# Altium PCB PCB1.PcbDoc (part 2 of 2)
Units mil, origin at the board's own origin, x right, y up, seen from the top; angles counter-clockwise.
Board outline 3035 x 2265 mil, 2 copper layers (Top Layer, Bottom Layer); 66 components, 70 nets, 274 pads, 24 vias.
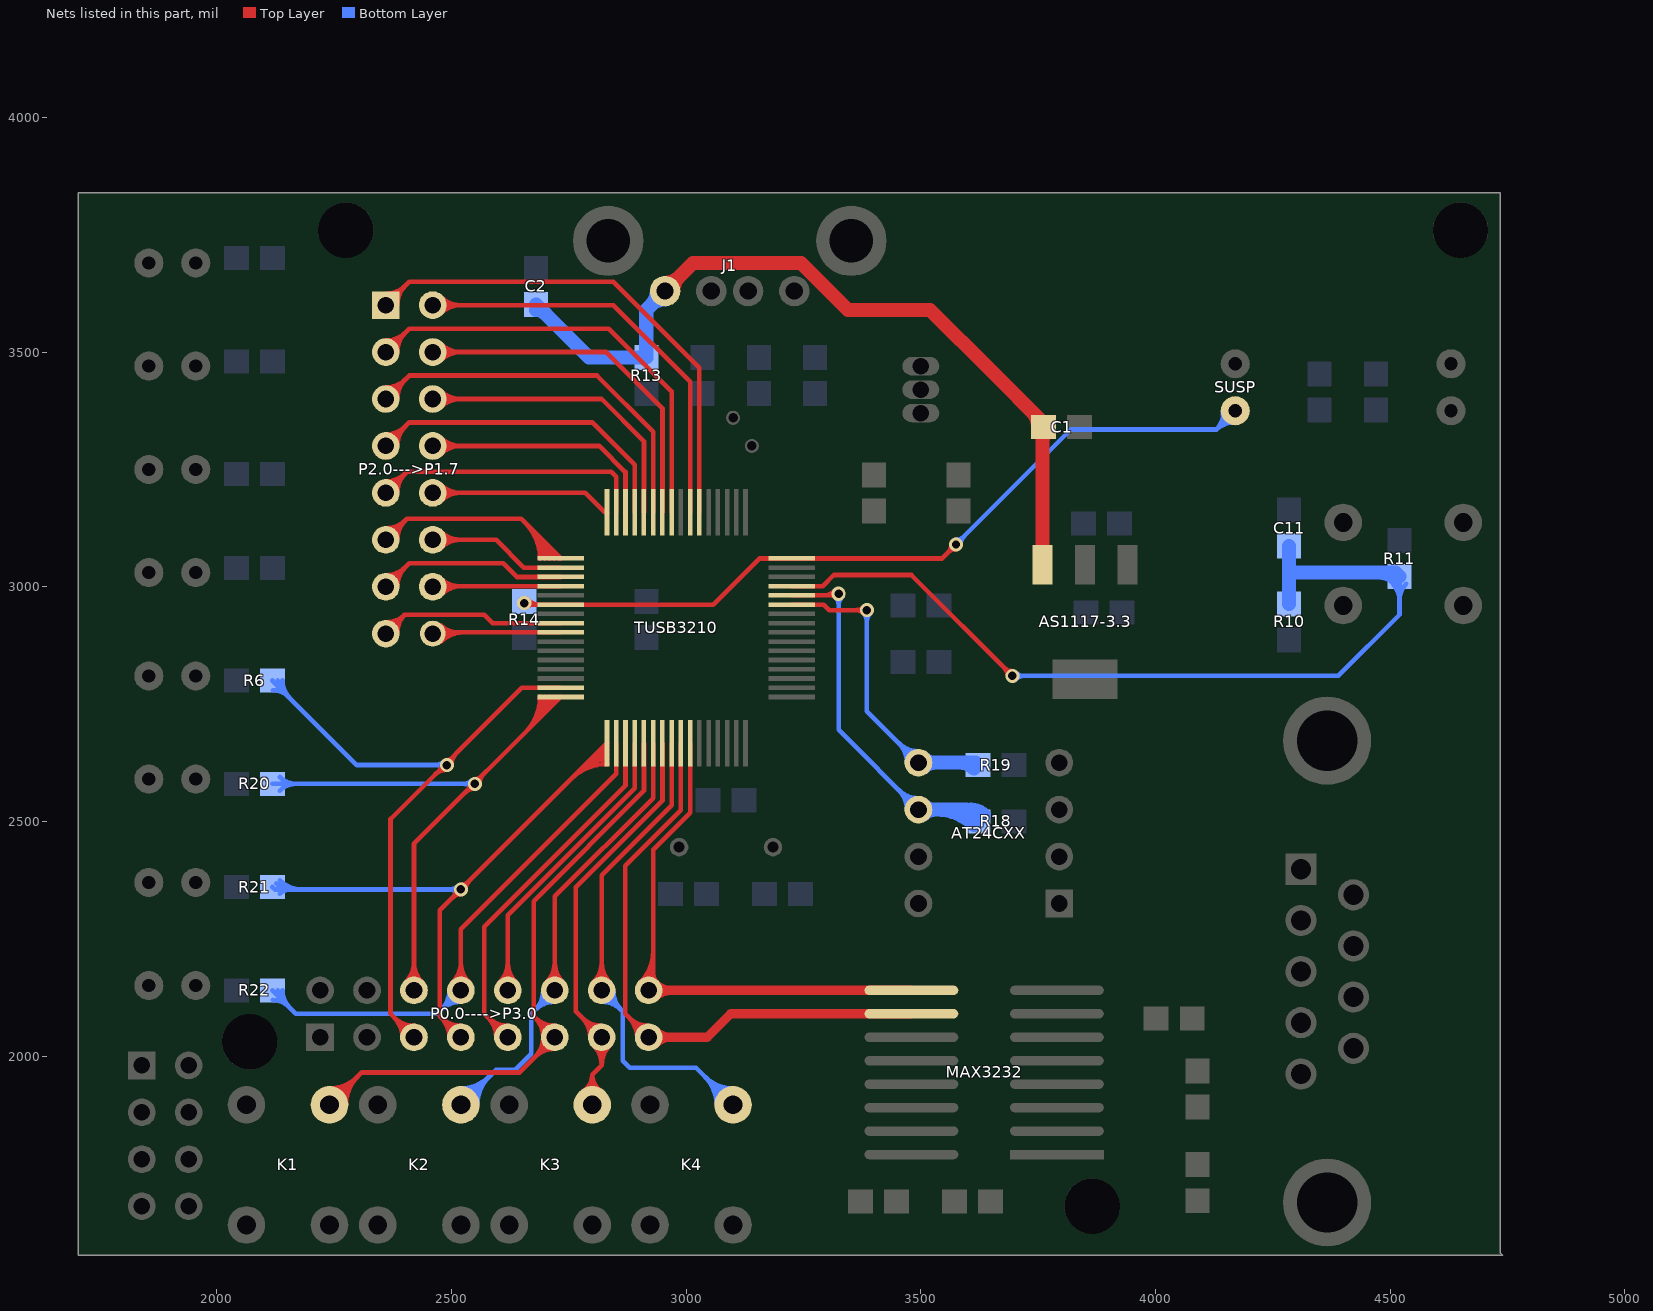
[diagram p2: the nets of this part, all layers, seen from the top]

## Via types
v1: diameter 30, hole 18, Top Layer to Bottom Layer, 24 vias

## Nets (pads, with @x,y where several pads share a name; then routed paths per layer and width w, separated by ;. In a path a pad name is that pad's centre, name@x,y a point inside that pad or via, vN(x,y) a via of type N, cw(c..) or ccw(c..) an arc to the next point about the centre after c; other vN are vias at no path point) (continued)
P0_4: P0.0---->P3.0.5 R6.1 TUSB3210.47 | length 2282.5
  Top Layer w10: P0.0---->P3.0.5@2420,2040 2370,2090 2370,2505 2649.68,2784.68 TUSB3210.47@2732.87,2784.68 ; 2378.13,2081.87 cw(c2336.26,2040) P0.0---->P3.0.5@2395.47,2040 ; 2378.13,2081.87 ccw(c2420,2123.74) P0.0---->P3.0.5@2420,2064.53 ; 2378.13,2081.87 cw(c2336.26,2040) P0.0---->P3.0.5@2395.47,2040 ; 2378.13,2081.87 ccw(c2420,2123.74) P0.0---->P3.0.5@2420,2064.53 ; 2378.13,2081.87 ccw(c2420,2123.74) P0.0---->P3.0.5@2420,2064.53 ; 2378.13,2081.87 cw(c2336.26,2040) P0.0---->P3.0.5@2395.47,2040 ; 2395.2,2064.8 cw(c2370.4,2040) P0.0---->P3.0.5@2405.47,2040 ; 2395.2,2064.8 ccw(c2420,2089.6) P0.0---->P3.0.5@2420,2054.53 ; 2395.2,2064.8 cw(c2370.4,2040) P0.0---->P3.0.5@2405.47,2040 ; 2395.2,2064.8 ccw(c2420,2089.6) P0.0---->P3.0.5@2420,2054.53 ; 2395.2,2064.8 ccw(c2420,2089.6) P0.0---->P3.0.5@2420,2054.53 ; 2395.2,2064.8 cw(c2370.4,2040) P0.0---->P3.0.5@2405.47,2040 ; 2464.39,2599.39 cw(c2490,2573.79) 2490,2610 ccw(c2490,2573.79) 2464.39,2599.39 ; 2476.46,2611.46 ccw(c2467.93,2620) 2480,2620 cw(c2467.93,2620) 2476.46,2611.46 ; v1@2490,2630 ccw(c2490,2642.07) 2498.54,2633.54 cw(c2490,2642.07) v1@2490,2630 ; v1@2500,2620 cw(c2536.21,2620) 2510.61,2645.61 ccw(c2536.21,2620) v1@2500,2620
  Bottom Layer w10: R6.1@2118.39,2800 2298.39,2620 v1(2490,2620) ; 2465.86,2620 cw(c2465.86,2595.86) 2482.93,2612.93 ccw(c2465.86,2595.86) 2465.86,2620 ; 2465.86,2620 ccw(c2465.86,2644.14) 2482.93,2627.07 cw(c2465.86,2644.14) 2465.86,2620 ; R6.1@2119.37,2779.41 cw(c2119.37,2732.08) 2152.84,2765.55 ccw(c2119.37,2732.08) R6.1@2119.37,2779.41 ; R6.1@2129.96,2800 ccw(c2157.91,2800) 2138.15,2780.24 cw(c2157.91,2800) R6.1@2129.96,2800 ; R6.1@2139.96,2800 ccw(c2192.05,2800) 2155.22,2763.17 cw(c2192.05,2800) R6.1@2139.96,2800
P0_5: P0.0---->P3.0.6 R20.1 TUSB3210.48 | length 2702.9
  Top Layer w10: P0.0---->P3.0.6@2420,2140 2420,2452.13 TUSB3210.48@2732.87,2765 ; P0.0---->P3.0.6@2402.66,2157.34 ccw(c2360.79,2199.21) 2420,2199.21 ; P0.0---->P3.0.6@2402.66,2157.34 ccw(c2360.79,2199.21) 2420,2199.21 ; P0.0---->P3.0.6@2402.66,2157.34 ccw(c2360.79,2199.21) 2420,2199.21 ; P0.0---->P3.0.6@2409.73,2150.27 ccw(c2384.93,2175.07) 2420,2175.07 ; P0.0---->P3.0.6@2409.73,2150.27 ccw(c2384.93,2175.07) 2420,2175.07 ; P0.0---->P3.0.6@2409.73,2150.27 ccw(c2384.93,2175.07) 2420,2175.07 ; 2420,2175.07 ccw(c2455.07,2175.07) P0.0---->P3.0.6@2430.27,2150.27 ; 2420,2175.07 ccw(c2455.07,2175.07) P0.0---->P3.0.6@2430.27,2150.27 ; 2420,2175.07 ccw(c2455.07,2175.07) P0.0---->P3.0.6@2430.27,2150.27 ; 2420,2199.21 ccw(c2479.21,2199.21) P0.0---->P3.0.6@2437.34,2157.34 ; 2420,2199.21 ccw(c2479.21,2199.21) P0.0---->P3.0.6@2437.34,2157.34 ; 2420,2199.21 ccw(c2479.21,2199.21) P0.0---->P3.0.6@2437.34,2157.34 ; 2657.4,2689.52 ccw(c2581.92,2765) TUSB3210.48@2688.66,2765 ; 2657.4,2689.52 ccw(c2581.92,2765) TUSB3210.48@2688.66,2765 ; 2657.4,2689.52 ccw(c2581.92,2765) TUSB3210.48@2688.66,2765 ; 2674.47,2706.6 ccw(c2616.07,2765) TUSB3210.48@2698.66,2765 ; 2674.47,2706.6 ccw(c2616.07,2765) TUSB3210.48@2698.66,2765 ; 2674.47,2706.6 ccw(c2616.07,2765) TUSB3210.48@2698.66,2765 ; 2691.54,2723.67 ccw(c2650.21,2765) TUSB3210.48@2708.66,2765 ; 2691.54,2723.67 ccw(c2650.21,2765) TUSB3210.48@2708.66,2765 ; 2691.54,2723.67 ccw(c2650.21,2765) TUSB3210.48@2708.66,2765 ; 2708.61,2740.74 ccw(c2684.35,2765) TUSB3210.48@2718.66,2765 ; 2708.61,2740.74 ccw(c2684.35,2765) TUSB3210.48@2718.66,2765 ; 2708.61,2740.74 ccw(c2684.35,2765) TUSB3210.48@2718.66,2765 ; 2725.68,2757.81 ccw(c2718.49,2765) TUSB3210.48@2728.66,2765 ; 2725.68,2757.81 ccw(c2718.49,2765) TUSB3210.48@2728.66,2765 ; 2725.68,2757.81 ccw(c2718.49,2765) TUSB3210.48@2728.66,2765 ; 2529.3,2561.43 cw(c2550,2540.73) 2550,2570 ccw(c2550,2540.73) 2529.3,2561.43 ; 2534.43,2566.56 ccw(c2520.99,2580) 2540,2580 cw(c2520.99,2580) 2534.43,2566.56 ; v1@2550,2590 ccw(c2550,2609.01) 2563.44,2595.57 cw(c2550,2609.01) v1@2550,2590 ; v1@2560,2580 cw(c2589.27,2580) 2568.57,2600.7 ccw(c2589.27,2580) v1@2560,2580
  Bottom Layer w10: R20.1@2118.39,2580 v1(2550,2580) ; 2169.08,2580 cw(c2169.08,2629.71) 2133.93,2594.56 ccw(c2169.08,2629.71) 2169.08,2580 ; 2169.08,2580 ccw(c2169.08,2530.29) 2133.93,2565.44 cw(c2169.08,2530.29) 2169.08,2580 ; 2525.86,2580 cw(c2525.86,2555.86) 2542.93,2572.93 ccw(c2525.86,2555.86) 2525.86,2580 ; 2525.86,2580 ccw(c2525.86,2604.14) 2542.93,2587.07 cw(c2525.86,2604.14) 2525.86,2580
P0_6: P0.0---->P3.0.7 R21.1 TUSB3210.49 | length 2780.1
  Top Layer w10: P0.0---->P3.0.7@2520,2040 2475,2085 2475,2310.28 TUSB3210.49@2831.3,2666.57 ; 2478.13,2081.87 cw(c2436.26,2040) P0.0---->P3.0.7@2495.47,2040 ; 2478.13,2081.87 ccw(c2520,2123.74) P0.0---->P3.0.7@2520,2064.53 ; 2478.13,2081.87 cw(c2436.26,2040) P0.0---->P3.0.7@2495.47,2040 ; 2478.13,2081.87 ccw(c2520,2123.74) P0.0---->P3.0.7@2520,2064.53 ; 2478.13,2081.87 ccw(c2520,2123.74) P0.0---->P3.0.7@2520,2064.53 ; 2478.13,2081.87 cw(c2436.26,2040) P0.0---->P3.0.7@2495.47,2040 ; 2495.2,2064.8 cw(c2470.4,2040) P0.0---->P3.0.7@2505.47,2040 ; 2495.2,2064.8 ccw(c2520,2089.6) P0.0---->P3.0.7@2520,2054.53 ; 2495.2,2064.8 cw(c2470.4,2040) P0.0---->P3.0.7@2505.47,2040 ; 2495.2,2064.8 ccw(c2520,2089.6) P0.0---->P3.0.7@2520,2054.53 ; 2495.2,2064.8 ccw(c2520,2089.6) P0.0---->P3.0.7@2520,2054.53 ; 2495.2,2064.8 cw(c2470.4,2040) P0.0---->P3.0.7@2505.47,2040 ; 2755.82,2591.1 cw(c2831.3,2515.62) TUSB3210.49@2831.3,2622.36 ; 2755.82,2591.1 cw(c2831.3,2515.62) TUSB3210.49@2831.3,2622.36 ; 2755.82,2591.1 cw(c2831.3,2515.62) TUSB3210.49@2831.3,2622.36 ; 2772.9,2608.17 cw(c2831.3,2549.77) TUSB3210.49@2831.3,2632.36 ; 2772.9,2608.17 cw(c2831.3,2549.77) TUSB3210.49@2831.3,2632.36 ; 2772.9,2608.17 cw(c2831.3,2549.77) TUSB3210.49@2831.3,2632.36 ; 2789.97,2625.24 cw(c2831.3,2583.91) TUSB3210.49@2831.3,2642.36 ; 2789.97,2625.24 cw(c2831.3,2583.91) TUSB3210.49@2831.3,2642.36 ; 2789.97,2625.24 cw(c2831.3,2583.91) TUSB3210.49@2831.3,2642.36 ; 2807.04,2642.31 cw(c2831.3,2618.05) TUSB3210.49@2831.3,2652.36 ; 2807.04,2642.31 cw(c2831.3,2618.05) TUSB3210.49@2831.3,2652.36 ; 2807.04,2642.31 cw(c2831.3,2618.05) TUSB3210.49@2831.3,2652.36 ; 2824.11,2659.38 cw(c2831.3,2652.19) TUSB3210.49@2831.3,2662.36 ; 2824.11,2659.38 cw(c2831.3,2652.19) TUSB3210.49@2831.3,2662.36 ; 2824.11,2659.38 cw(c2831.3,2652.19) TUSB3210.49@2831.3,2662.36 ; 2502.46,2337.73 cw(c2520,2320.19) 2520,2345 ccw(c2520,2320.19) 2502.46,2337.73 ; 2503.12,2338.4 ccw(c2486.52,2355) 2510,2355 cw(c2486.52,2355) 2503.12,2338.4 ; v1@2520,2365 ccw(c2520,2388.48) 2536.6,2371.88 cw(c2520,2388.48) v1@2520,2365 ; v1@2530,2355 cw(c2554.81,2355) 2537.27,2372.54 ccw(c2554.81,2355) v1@2530,2355
  Bottom Layer w10: R21.1@2118.39,2360 2123.39,2355 v1(2520,2355) ; 2157.01,2355 cw(c2157.01,2397.64) 2126.86,2367.49 ccw(c2157.01,2397.64) 2157.01,2355 ; 2157.01,2355 ccw(c2157.01,2322.36) 2133.93,2345.44 cw(c2157.01,2322.36) 2157.01,2355 ; 2495.86,2355 cw(c2495.86,2330.86) 2512.93,2347.93 ccw(c2495.86,2330.86) 2495.86,2355 ; 2495.86,2355 ccw(c2495.86,2379.14) 2512.93,2362.07 cw(c2495.86,2379.14) 2495.86,2355 ; R21.1@2133.93,2374.56 ccw(c2181.15,2421.78) 2181.15,2355 cw(c2181.15,2421.78) R21.1@2133.93,2374.56
P0_7: P0.0---->P3.0.8 R22.1 TUSB3210.50 | length 2047.3
  Top Layer w10: P0.0---->P3.0.8@2520,2140 2520,2270 2850.98,2600.98 TUSB3210.50@2850.98,2666.57 ; P0.0---->P3.0.8@2502.66,2157.34 ccw(c2460.79,2199.21) 2520,2199.21 ; P0.0---->P3.0.8@2502.66,2157.34 ccw(c2460.79,2199.21) 2520,2199.21 ; P0.0---->P3.0.8@2502.66,2157.34 ccw(c2460.79,2199.21) 2520,2199.21 ; P0.0---->P3.0.8@2509.73,2150.27 ccw(c2484.93,2175.07) 2520,2175.07 ; P0.0---->P3.0.8@2509.73,2150.27 ccw(c2484.93,2175.07) 2520,2175.07 ; P0.0---->P3.0.8@2509.73,2150.27 ccw(c2484.93,2175.07) 2520,2175.07 ; 2520,2175.07 ccw(c2555.07,2175.07) P0.0---->P3.0.8@2530.27,2150.27 ; 2520,2175.07 ccw(c2555.07,2175.07) P0.0---->P3.0.8@2530.27,2150.27 ; 2520,2175.07 ccw(c2555.07,2175.07) P0.0---->P3.0.8@2530.27,2150.27 ; 2520,2199.21 ccw(c2579.21,2199.21) P0.0---->P3.0.8@2537.34,2157.34 ; 2520,2199.21 ccw(c2579.21,2199.21) P0.0---->P3.0.8@2537.34,2157.34 ; 2520,2199.21 ccw(c2579.21,2199.21) P0.0---->P3.0.8@2537.34,2157.34
  Bottom Layer w10: R22.1@2118.39,2140 2168.39,2090 2470,2090 P0.0---->P3.0.8@2520,2140 ; 2478.13,2098.13 cw(c2520,2056.26) 2520,2115.47 ccw(c2520,2056.26) 2478.13,2098.13 ; 2478.13,2098.13 ccw(c2436.26,2140) 2495.47,2140 cw(c2436.26,2140) 2478.13,2098.13 ; 2495.2,2115.2 cw(c2520,2090.4) 2520,2125.47 ccw(c2520,2090.4) 2495.2,2115.2 ; 2495.2,2115.2 ccw(c2470.4,2140) 2505.47,2140 cw(c2470.4,2140) 2495.2,2115.2 ; R22.1@2119.37,2119.41 cw(c2119.37,2072.08) 2152.84,2105.55 ccw(c2119.37,2072.08) R22.1@2119.37,2119.41 ; R22.1@2129.96,2140 ccw(c2157.91,2140) 2138.15,2120.24 cw(c2157.91,2140) R22.1@2129.96,2140 ; R22.1@2139.96,2140 ccw(c2192.05,2140) 2155.22,2103.17 cw(c2192.05,2140) R22.1@2139.96,2140
P1_0: P2.0--->P1.7.9 TUSB3210.31 | length 1033.8
  Top Layer w10: P2.0--->P1.7.9@2360,3200 2405,3245 2840,3245 2850.98,3234.02 TUSB3210.31@2850.98,3158.7 ; P2.0--->P1.7.9@2360,3214.53 ccw(c2360,3249.6) 2384.8,3224.8 ; P2.0--->P1.7.9@2360,3214.53 ccw(c2360,3249.6) 2384.8,3224.8 ; P2.0--->P1.7.9@2360,3214.53 ccw(c2360,3249.6) 2384.8,3224.8 ; P2.0--->P1.7.9@2360,3224.53 ccw(c2360,3283.74) 2401.87,3241.87 ; P2.0--->P1.7.9@2360,3224.53 ccw(c2360,3283.74) 2401.87,3241.87 ; P2.0--->P1.7.9@2360,3224.53 ccw(c2360,3283.74) 2401.87,3241.87 ; P2.0--->P1.7.9@2374.53,3200 cw(c2409.6,3200) 2384.8,3224.8 ; P2.0--->P1.7.9@2374.53,3200 cw(c2409.6,3200) 2384.8,3224.8 ; P2.0--->P1.7.9@2374.53,3200 cw(c2409.6,3200) 2384.8,3224.8 ; P2.0--->P1.7.9@2384.53,3200 cw(c2443.74,3200) 2401.87,3241.87 ; P2.0--->P1.7.9@2384.53,3200 cw(c2443.74,3200) 2401.87,3241.87 ; P2.0--->P1.7.9@2384.53,3200 cw(c2443.74,3200) 2401.87,3241.87
P1_1: P2.0--->P1.7.10 TUSB3210.32 | length 832.7
  Top Layer w10: P2.0--->P1.7.10@2460,3200 2785,3200 2826.3,3158.7 TUSB3210.32@2831.3,3158.7 ; P2.0--->P1.7.10@2470.27,3189.73 cw(c2495.07,3164.93) 2495.07,3200 ; P2.0--->P1.7.10@2470.27,3189.73 cw(c2495.07,3164.93) 2495.07,3200 ; P2.0--->P1.7.10@2470.27,3189.73 cw(c2495.07,3164.93) 2495.07,3200 ; P2.0--->P1.7.10@2470.27,3210.27 ccw(c2495.07,3235.07) 2495.07,3200 ; P2.0--->P1.7.10@2470.27,3210.27 ccw(c2495.07,3235.07) 2495.07,3200 ; P2.0--->P1.7.10@2470.27,3210.27 ccw(c2495.07,3235.07) 2495.07,3200 ; P2.0--->P1.7.10@2477.34,3182.66 cw(c2519.21,3140.79) 2519.21,3200 ; P2.0--->P1.7.10@2477.34,3182.66 cw(c2519.21,3140.79) 2519.21,3200 ; P2.0--->P1.7.10@2477.34,3182.66 cw(c2519.21,3140.79) 2519.21,3200 ; P2.0--->P1.7.10@2477.34,3217.34 ccw(c2519.21,3259.21) 2519.21,3200 ; P2.0--->P1.7.10@2477.34,3217.34 ccw(c2519.21,3259.21) 2519.21,3200 ; P2.0--->P1.7.10@2477.34,3217.34 ccw(c2519.21,3259.21) 2519.21,3200
P1_2: P2.0--->P1.7.11 TUSB3210.33 | length 1559.6
  Top Layer w10: P2.0--->P1.7.11@2360,3100 2405,3145 2648.15,3145 TUSB3210.33@2732.87,3060.28 ; P2.0--->P1.7.11@2360,3114.53 ccw(c2360,3149.6) 2384.8,3124.8 ; P2.0--->P1.7.11@2360,3114.53 ccw(c2360,3149.6) 2384.8,3124.8 ; P2.0--->P1.7.11@2360,3114.53 ccw(c2360,3149.6) 2384.8,3124.8 ; P2.0--->P1.7.11@2360,3124.53 ccw(c2360,3183.74) 2401.87,3141.87 ; P2.0--->P1.7.11@2360,3124.53 ccw(c2360,3183.74) 2401.87,3141.87 ; P2.0--->P1.7.11@2360,3124.53 ccw(c2360,3183.74) 2401.87,3141.87 ; P2.0--->P1.7.11@2374.53,3100 cw(c2409.6,3100) 2384.8,3124.8 ; P2.0--->P1.7.11@2374.53,3100 cw(c2409.6,3100) 2384.8,3124.8 ; P2.0--->P1.7.11@2374.53,3100 cw(c2409.6,3100) 2384.8,3124.8 ; P2.0--->P1.7.11@2384.53,3100 cw(c2443.74,3100) 2401.87,3141.87 ; P2.0--->P1.7.11@2384.53,3100 cw(c2443.74,3100) 2401.87,3141.87 ; P2.0--->P1.7.11@2384.53,3100 cw(c2443.74,3100) 2401.87,3141.87 ; 2657.4,3135.75 cw(c2581.92,3060.28) TUSB3210.33@2688.66,3060.28 ; 2657.4,3135.75 cw(c2581.92,3060.28) TUSB3210.33@2688.66,3060.28 ; 2657.4,3135.75 cw(c2581.92,3060.28) TUSB3210.33@2688.66,3060.28 ; 2674.47,3118.68 cw(c2616.07,3060.28) TUSB3210.33@2698.66,3060.28 ; 2674.47,3118.68 cw(c2616.07,3060.28) TUSB3210.33@2698.66,3060.28 ; 2674.47,3118.68 cw(c2616.07,3060.28) TUSB3210.33@2698.66,3060.28 ; 2691.54,3101.61 cw(c2650.21,3060.28) TUSB3210.33@2708.66,3060.28 ; 2691.54,3101.61 cw(c2650.21,3060.28) TUSB3210.33@2708.66,3060.28 ; 2691.54,3101.61 cw(c2650.21,3060.28) TUSB3210.33@2708.66,3060.28 ; 2708.61,3084.54 cw(c2684.35,3060.28) TUSB3210.33@2718.66,3060.28 ; 2708.61,3084.54 cw(c2684.35,3060.28) TUSB3210.33@2718.66,3060.28 ; 2708.61,3084.54 cw(c2684.35,3060.28) TUSB3210.33@2718.66,3060.28 ; 2725.68,3067.47 cw(c2718.49,3060.28) TUSB3210.33@2728.66,3060.28 ; 2725.68,3067.47 cw(c2718.49,3060.28) TUSB3210.33@2728.66,3060.28 ; 2725.68,3067.47 cw(c2718.49,3060.28) TUSB3210.33@2728.66,3060.28
P1_3: P2.0--->P1.7.12 TUSB3210.34 | length 741.8
  Top Layer w10: P2.0--->P1.7.12@2460,3100 2595,3100 2654.41,3040.59 TUSB3210.34@2732.87,3040.59 ; P2.0--->P1.7.12@2470.27,3089.73 cw(c2495.07,3064.93) 2495.07,3100 ; P2.0--->P1.7.12@2470.27,3089.73 cw(c2495.07,3064.93) 2495.07,3100 ; P2.0--->P1.7.12@2470.27,3089.73 cw(c2495.07,3064.93) 2495.07,3100 ; P2.0--->P1.7.12@2470.27,3110.27 ccw(c2495.07,3135.07) 2495.07,3100 ; P2.0--->P1.7.12@2470.27,3110.27 ccw(c2495.07,3135.07) 2495.07,3100 ; P2.0--->P1.7.12@2470.27,3110.27 ccw(c2495.07,3135.07) 2495.07,3100 ; P2.0--->P1.7.12@2477.34,3082.66 cw(c2519.21,3040.79) 2519.21,3100 ; P2.0--->P1.7.12@2477.34,3082.66 cw(c2519.21,3040.79) 2519.21,3100 ; P2.0--->P1.7.12@2477.34,3082.66 cw(c2519.21,3040.79) 2519.21,3100 ; P2.0--->P1.7.12@2477.34,3117.34 ccw(c2519.21,3159.21) 2519.21,3100 ; P2.0--->P1.7.12@2477.34,3117.34 ccw(c2519.21,3159.21) 2519.21,3100 ; P2.0--->P1.7.12@2477.34,3117.34 ccw(c2519.21,3159.21) 2519.21,3100
P1_4: P2.0--->P1.7.13 TUSB3210.35 | length 850
  Top Layer w10: P2.0--->P1.7.13@2360,3000 2410,3050 2610,3050 2639.09,3020.91 TUSB3210.35@2732.87,3020.91 ; P2.0--->P1.7.13@2360,3014.53 ccw(c2360,3049.6) 2384.8,3024.8 ; P2.0--->P1.7.13@2360,3014.53 ccw(c2360,3049.6) 2384.8,3024.8 ; P2.0--->P1.7.13@2360,3014.53 ccw(c2360,3049.6) 2384.8,3024.8 ; P2.0--->P1.7.13@2360,3024.53 ccw(c2360,3083.74) 2401.87,3041.87 ; P2.0--->P1.7.13@2360,3024.53 ccw(c2360,3083.74) 2401.87,3041.87 ; P2.0--->P1.7.13@2360,3024.53 ccw(c2360,3083.74) 2401.87,3041.87 ; P2.0--->P1.7.13@2374.53,3000 cw(c2409.6,3000) 2384.8,3024.8 ; P2.0--->P1.7.13@2374.53,3000 cw(c2409.6,3000) 2384.8,3024.8 ; P2.0--->P1.7.13@2374.53,3000 cw(c2409.6,3000) 2384.8,3024.8 ; P2.0--->P1.7.13@2384.53,3000 cw(c2443.74,3000) 2401.87,3041.87 ; P2.0--->P1.7.13@2384.53,3000 cw(c2443.74,3000) 2401.87,3041.87 ; P2.0--->P1.7.13@2384.53,3000 cw(c2443.74,3000) 2401.87,3041.87
P1_5: P2.0--->P1.7.14 TUSB3210.36 | length 717.7
  Top Layer w10: P2.0--->P1.7.14@2460,3000 2461.22,3001.22 TUSB3210.36@2732.87,3001.22 ; P2.0--->P1.7.14@2470.27,2989.73 cw(c2498.02,2961.98) 2498.02,3001.22 ; P2.0--->P1.7.14@2470.27,2989.73 cw(c2498.02,2961.98) 2498.02,3001.22 ; P2.0--->P1.7.14@2470.27,2989.73 cw(c2498.02,2961.98) 2498.02,3001.22 ; P2.0--->P1.7.14@2470.27,3010.27 ccw(c2492.13,3032.13) 2492.13,3001.22 ; P2.0--->P1.7.14@2470.27,3010.27 ccw(c2492.13,3032.13) 2492.13,3001.22 ; P2.0--->P1.7.14@2470.27,3010.27 ccw(c2492.13,3032.13) 2492.13,3001.22 ; P2.0--->P1.7.14@2477.34,2982.66 cw(c2522.16,2937.84) 2522.16,3001.22 ; P2.0--->P1.7.14@2477.34,2982.66 cw(c2522.16,2937.84) 2522.16,3001.22 ; P2.0--->P1.7.14@2477.34,2982.66 cw(c2522.16,2937.84) 2522.16,3001.22 ; P2.0--->P1.7.14@2477.34,3017.34 ccw(c2516.27,3056.27) 2516.27,3001.22 ; P2.0--->P1.7.14@2477.34,3017.34 ccw(c2516.27,3056.27) 2516.27,3001.22 ; P2.0--->P1.7.14@2477.34,3017.34 ccw(c2516.27,3056.27) 2516.27,3001.22
P1_6: P2.0--->P1.7.15 TUSB3210.40 | length 534.7
  Top Layer w10: P2.0--->P1.7.15@2360,2900 2400,2940 ; P2.0--->P1.7.15@2360.48,2914.52 ccw(c2361.51,2945.87) 2383.69,2923.69 ccw(c2405.87,2901.51) P2.0--->P1.7.15@2374.52,2900.48 ; P2.0--->P1.7.15@2360.81,2924.51 ccw(c2362.55,2977.45) 2400,2940 ; P2.0--->P1.7.15@2384.51,2900.81 cw(c2437.45,2902.55) 2400,2940 ; TUSB3210.40@2732.87,2922.48 2587.48,2922.48 2569.96,2940 2400,2940
P1_7: P2.0--->P1.7.16 TUSB3210.41 | length 646.7
  Top Layer w10: P2.0--->P1.7.16@2460,2900 2462.8,2902.8 TUSB3210.41@2732.87,2902.8 ; P2.0--->P1.7.16@2468.84,2891.16 cw(c2496.93,2863.07) 2496.93,2902.8 ; P2.0--->P1.7.16@2475.91,2884.09 cw(c2521.07,2838.93) 2521.07,2902.8 ; P2.0--->P1.7.16@2475.91,2915.91 ccw(c2507.57,2947.57) 2507.57,2902.8 ; P2.0--->P1.7.16@2470.27,2889.73 cw(c2501.82,2858.18) 2501.82,2902.8 ccw(c2501.82,2858.18) P2.0--->P1.7.16@2470.27,2889.73 ; P2.0--->P1.7.16@2477.34,2882.66 cw(c2525.96,2834.04) 2525.96,2902.8 ccw(c2525.96,2834.04) P2.0--->P1.7.16@2477.34,2882.66 ; P2.0--->P1.7.16@2477.34,2917.34 ccw(c2512.47,2952.47) 2512.47,2902.8 cw(c2512.47,2952.47) P2.0--->P1.7.16@2477.34,2917.34
P2_0: P2.0--->P1.7.1 TUSB3210.22 | length 1517.2
  Top Layer w10: P2.0--->P1.7.1@2360,3600 2410,3650 2845,3650 3028.15,3466.85 TUSB3210.22@3028.15,3158.7 ; P2.0--->P1.7.1@2360,3614.53 ccw(c2360,3649.6) P2.0--->P1.7.1@2384.8,3624.8 ; P2.0--->P1.7.1@2360,3614.53 ccw(c2360,3649.6) P2.0--->P1.7.1@2384.8,3624.8 ; P2.0--->P1.7.1@2360,3614.53 ccw(c2360,3649.6) P2.0--->P1.7.1@2384.8,3624.8 ; P2.0--->P1.7.1@2360,3624.53 ccw(c2360,3683.74) 2401.87,3641.87 ; P2.0--->P1.7.1@2360,3624.53 ccw(c2360,3683.74) 2401.87,3641.87 ; P2.0--->P1.7.1@2360,3624.53 ccw(c2360,3683.74) 2401.87,3641.87 ; P2.0--->P1.7.1@2374.53,3600 cw(c2409.6,3600) P2.0--->P1.7.1@2384.8,3624.8 ; P2.0--->P1.7.1@2374.53,3600 cw(c2409.6,3600) P2.0--->P1.7.1@2384.8,3624.8 ; P2.0--->P1.7.1@2374.53,3600 cw(c2409.6,3600) P2.0--->P1.7.1@2384.8,3624.8 ; P2.0--->P1.7.1@2384.53,3600 cw(c2443.74,3600) 2401.87,3641.87 ; P2.0--->P1.7.1@2384.53,3600 cw(c2443.74,3600) 2401.87,3641.87 ; P2.0--->P1.7.1@2384.53,3600 cw(c2443.74,3600) 2401.87,3641.87
P2_1: P2.0--->P1.7.2 TUSB3210.23 | length 1338.3
  Top Layer w10: P2.0--->P1.7.2@2460,3600 2845,3600 3008.46,3436.54 TUSB3210.23@3008.46,3158.7 ; P2.0--->P1.7.2@2470.27,3589.73 cw(c2495.07,3564.93) 2495.07,3600 ; P2.0--->P1.7.2@2470.27,3589.73 cw(c2495.07,3564.93) 2495.07,3600 ; P2.0--->P1.7.2@2470.27,3589.73 cw(c2495.07,3564.93) 2495.07,3600 ; P2.0--->P1.7.2@2470.27,3610.27 ccw(c2495.07,3635.07) 2495.07,3600 ; P2.0--->P1.7.2@2470.27,3610.27 ccw(c2495.07,3635.07) 2495.07,3600 ; P2.0--->P1.7.2@2470.27,3610.27 ccw(c2495.07,3635.07) 2495.07,3600 ; P2.0--->P1.7.2@2477.34,3582.66 cw(c2519.21,3540.79) 2519.21,3600 ; P2.0--->P1.7.2@2477.34,3582.66 cw(c2519.21,3540.79) 2519.21,3600 ; P2.0--->P1.7.2@2477.34,3582.66 cw(c2519.21,3540.79) 2519.21,3600 ; P2.0--->P1.7.2@2477.34,3617.34 ccw(c2519.21,3659.21) 2519.21,3600 ; P2.0--->P1.7.2@2477.34,3617.34 ccw(c2519.21,3659.21) 2519.21,3600 ; P2.0--->P1.7.2@2477.34,3617.34 ccw(c2519.21,3659.21) 2519.21,3600
P2_2: P2.0--->P1.7.3 TUSB3210.25 | length 1386.9
  Top Layer w10: P2.0--->P1.7.3@2360,3500 2410,3550 2835,3550 2969.09,3415.91 TUSB3210.25@2969.09,3158.7 ; P2.0--->P1.7.3@2360,3514.53 ccw(c2360,3549.6) 2384.8,3524.8 ; P2.0--->P1.7.3@2360,3514.53 ccw(c2360,3549.6) 2384.8,3524.8 ; P2.0--->P1.7.3@2360,3514.53 ccw(c2360,3549.6) 2384.8,3524.8 ; P2.0--->P1.7.3@2360,3524.53 ccw(c2360,3583.74) 2401.87,3541.87 ; P2.0--->P1.7.3@2360,3524.53 ccw(c2360,3583.74) 2401.87,3541.87 ; P2.0--->P1.7.3@2360,3524.53 ccw(c2360,3583.74) 2401.87,3541.87 ; P2.0--->P1.7.3@2374.53,3500 cw(c2409.6,3500) 2384.8,3524.8 ; P2.0--->P1.7.3@2374.53,3500 cw(c2409.6,3500) 2384.8,3524.8 ; P2.0--->P1.7.3@2374.53,3500 cw(c2409.6,3500) 2384.8,3524.8 ; P2.0--->P1.7.3@2384.53,3500 cw(c2443.74,3500) 2401.87,3541.87 ; P2.0--->P1.7.3@2384.53,3500 cw(c2443.74,3500) 2401.87,3541.87 ; P2.0--->P1.7.3@2384.53,3500 cw(c2443.74,3500) 2401.87,3541.87
P2_3: P2.0--->P1.7.4 TUSB3210.26 | length 1205.1
  Top Layer w10: P2.0--->P1.7.4@2460,3500 2830,3500 2949.41,3380.59 TUSB3210.26@2949.41,3158.7 ; P2.0--->P1.7.4@2470.27,3489.73 cw(c2495.07,3464.93) 2495.07,3500 ; P2.0--->P1.7.4@2470.27,3489.73 cw(c2495.07,3464.93) 2495.07,3500 ; P2.0--->P1.7.4@2470.27,3489.73 cw(c2495.07,3464.93) 2495.07,3500 ; P2.0--->P1.7.4@2470.27,3510.27 ccw(c2495.07,3535.07) 2495.07,3500 ; P2.0--->P1.7.4@2470.27,3510.27 ccw(c2495.07,3535.07) 2495.07,3500 ; P2.0--->P1.7.4@2470.27,3510.27 ccw(c2495.07,3535.07) 2495.07,3500 ; P2.0--->P1.7.4@2477.34,3482.66 cw(c2519.21,3440.79) 2519.21,3500 ; P2.0--->P1.7.4@2477.34,3482.66 cw(c2519.21,3440.79) 2519.21,3500 ; P2.0--->P1.7.4@2477.34,3482.66 cw(c2519.21,3440.79) 2519.21,3500 ; P2.0--->P1.7.4@2477.34,3517.34 ccw(c2519.21,3559.21) 2519.21,3500 ; P2.0--->P1.7.4@2477.34,3517.34 ccw(c2519.21,3559.21) 2519.21,3500 ; P2.0--->P1.7.4@2477.34,3517.34 ccw(c2519.21,3559.21) 2519.21,3500
P2_4: P2.0--->P1.7.5 TUSB3210.27 | length 1255.9
  Top Layer w10: P2.0--->P1.7.5@2360,3400 2410,3450 2810,3450 2929.72,3330.28 TUSB3210.27@2929.72,3158.7 ; P2.0--->P1.7.5@2360,3414.53 ccw(c2360,3449.6) 2384.8,3424.8 ; P2.0--->P1.7.5@2360,3414.53 ccw(c2360,3449.6) 2384.8,3424.8 ; P2.0--->P1.7.5@2360,3414.53 ccw(c2360,3449.6) 2384.8,3424.8 ; P2.0--->P1.7.5@2360,3424.53 ccw(c2360,3483.74) 2401.87,3441.87 ; P2.0--->P1.7.5@2360,3424.53 ccw(c2360,3483.74) 2401.87,3441.87 ; P2.0--->P1.7.5@2360,3424.53 ccw(c2360,3483.74) 2401.87,3441.87 ; P2.0--->P1.7.5@2374.53,3400 cw(c2409.6,3400) 2384.8,3424.8 ; P2.0--->P1.7.5@2374.53,3400 cw(c2409.6,3400) 2384.8,3424.8 ; P2.0--->P1.7.5@2374.53,3400 cw(c2409.6,3400) 2384.8,3424.8 ; P2.0--->P1.7.5@2384.53,3400 cw(c2443.74,3400) 2401.87,3441.87 ; P2.0--->P1.7.5@2384.53,3400 cw(c2443.74,3400) 2401.87,3441.87 ; P2.0--->P1.7.5@2384.53,3400 cw(c2443.74,3400) 2401.87,3441.87
P2_5: P2.0--->P1.7.6 TUSB3210.28 | length 1082.9
  Top Layer w10: P2.0--->P1.7.6@2460,3400 2820,3400 2910.04,3309.96 TUSB3210.28@2910.04,3158.7 ; P2.0--->P1.7.6@2470.27,3389.73 cw(c2495.07,3364.93) 2495.07,3400 ; P2.0--->P1.7.6@2470.27,3389.73 cw(c2495.07,3364.93) 2495.07,3400 ; P2.0--->P1.7.6@2470.27,3389.73 cw(c2495.07,3364.93) 2495.07,3400 ; P2.0--->P1.7.6@2470.27,3410.27 ccw(c2495.07,3435.07) 2495.07,3400 ; P2.0--->P1.7.6@2470.27,3410.27 ccw(c2495.07,3435.07) 2495.07,3400 ; P2.0--->P1.7.6@2470.27,3410.27 ccw(c2495.07,3435.07) 2495.07,3400 ; P2.0--->P1.7.6@2477.34,3382.66 cw(c2519.21,3340.79) 2519.21,3400 ; P2.0--->P1.7.6@2477.34,3382.66 cw(c2519.21,3340.79) 2519.21,3400 ; P2.0--->P1.7.6@2477.34,3382.66 cw(c2519.21,3340.79) 2519.21,3400 ; P2.0--->P1.7.6@2477.34,3417.34 ccw(c2519.21,3459.21) 2519.21,3400 ; P2.0--->P1.7.6@2477.34,3417.34 ccw(c2519.21,3459.21) 2519.21,3400 ; P2.0--->P1.7.6@2477.34,3417.34 ccw(c2519.21,3459.21) 2519.21,3400
P2_6: P2.0--->P1.7.7 TUSB3210.29 | length 1133.8
  Top Layer w10: P2.0--->P1.7.7@2360,3300 2410,3350 2800,3350 2890.35,3259.65 TUSB3210.29@2890.35,3158.7 ; P2.0--->P1.7.7@2360,3314.53 ccw(c2360,3349.6) 2384.8,3324.8 ; P2.0--->P1.7.7@2360,3314.53 ccw(c2360,3349.6) 2384.8,3324.8 ; P2.0--->P1.7.7@2360,3314.53 ccw(c2360,3349.6) 2384.8,3324.8 ; P2.0--->P1.7.7@2360,3324.53 ccw(c2360,3383.74) 2401.87,3341.87 ; P2.0--->P1.7.7@2360,3324.53 ccw(c2360,3383.74) 2401.87,3341.87 ; P2.0--->P1.7.7@2360,3324.53 ccw(c2360,3383.74) 2401.87,3341.87 ; P2.0--->P1.7.7@2374.53,3300 cw(c2409.6,3300) 2384.8,3324.8 ; P2.0--->P1.7.7@2374.53,3300 cw(c2409.6,3300) 2384.8,3324.8 ; P2.0--->P1.7.7@2374.53,3300 cw(c2409.6,3300) 2384.8,3324.8 ; P2.0--->P1.7.7@2384.53,3300 cw(c2443.74,3300) 2401.87,3341.87 ; P2.0--->P1.7.7@2384.53,3300 cw(c2443.74,3300) 2401.87,3341.87 ; P2.0--->P1.7.7@2384.53,3300 cw(c2443.74,3300) 2401.87,3341.87
P2_7: P2.0--->P1.7.8 TUSB3210.30 | length 963.7
  Top Layer w10: P2.0--->P1.7.8@2460,3300 2815,3300 2870.67,3244.33 TUSB3210.30@2870.67,3158.7 ; P2.0--->P1.7.8@2470.27,3289.73 cw(c2495.07,3264.93) 2495.07,3300 ; P2.0--->P1.7.8@2470.27,3289.73 cw(c2495.07,3264.93) 2495.07,3300 ; P2.0--->P1.7.8@2470.27,3289.73 cw(c2495.07,3264.93) 2495.07,3300 ; P2.0--->P1.7.8@2470.27,3310.27 ccw(c2495.07,3335.07) 2495.07,3300 ; P2.0--->P1.7.8@2470.27,3310.27 ccw(c2495.07,3335.07) 2495.07,3300 ; P2.0--->P1.7.8@2470.27,3310.27 ccw(c2495.07,3335.07) 2495.07,3300 ; P2.0--->P1.7.8@2477.34,3282.66 cw(c2519.21,3240.79) 2519.21,3300 ; P2.0--->P1.7.8@2477.34,3282.66 cw(c2519.21,3240.79) 2519.21,3300 ; P2.0--->P1.7.8@2477.34,3282.66 cw(c2519.21,3240.79) 2519.21,3300 ; P2.0--->P1.7.8@2477.34,3317.34 ccw(c2519.21,3359.21) 2519.21,3300 ; P2.0--->P1.7.8@2477.34,3317.34 ccw(c2519.21,3359.21) 2519.21,3300 ; P2.0--->P1.7.8@2477.34,3317.34 ccw(c2519.21,3359.21) 2519.21,3300
P3_0: MAX3232.9 P0.0---->P3.0.16 TUSB3210.58 | length 1819.6
  Top Layer w10: P0.0---->P3.0.16@2920,2140 2930,2150 2930,2440 3008.46,2518.46 TUSB3210.58@3008.46,2666.57 ; P0.0---->P3.0.16@2902.66,2157.34 ccw(c2836.64,2223.36) 2930,2223.36 ; P0.0---->P3.0.16@2902.66,2157.34 ccw(c2836.64,2223.36) 2930,2223.36 ; P0.0---->P3.0.16@2902.66,2157.34 ccw(c2836.64,2223.36) 2930,2223.36 ; P0.0---->P3.0.16@2909.73,2150.27 ccw(c2860.79,2199.21) 2930,2199.21 ; P0.0---->P3.0.16@2909.73,2150.27 ccw(c2860.79,2199.21) 2930,2199.21 ; P0.0---->P3.0.16@2909.73,2150.27 ccw(c2860.79,2199.21) 2930,2199.21 ; P0.0---->P3.0.16@2916.8,2143.2 ccw(c2884.93,2175.07) 2930,2175.07 ; P0.0---->P3.0.16@2916.8,2143.2 ccw(c2884.93,2175.07) 2930,2175.07 ; P0.0---->P3.0.16@2916.8,2143.2 ccw(c2884.93,2175.07) 2930,2175.07 ; 2930,2175.07 ccw(c2955.07,2175.07) P0.0---->P3.0.16@2937.34,2157.34 ; 2930,2175.07 ccw(c2955.07,2175.07) P0.0---->P3.0.16@2937.34,2157.34 ; 2930,2175.07 ccw(c2955.07,2175.07) P0.0---->P3.0.16@2937.34,2157.34
  Top Layer w20: P0.0---->P3.0.16@2920,2140 MAX3232.9@3480,2140 ; 2967.14,2140 cw(c2967.14,2187.14) 2933.81,2153.81 ccw(c2967.14,2187.14) 2967.14,2140 ; 2967.14,2140 ccw(c2967.14,2092.86) 2933.81,2126.19 cw(c2967.14,2092.86) 2967.14,2140
P3_1: MAX3232.10 P0.0---->P3.0.15 TUSB3210.57 | length 1869.6
  Top Layer w10: P0.0---->P3.0.15@2920,2040 2870,2090 2870,2405 2988.78,2523.78 TUSB3210.57@2988.78,2666.57 ; 2878.13,2081.87 cw(c2836.26,2040) P0.0---->P3.0.15@2895.47,2040 ; 2878.13,2081.87 ccw(c2920,2123.74) P0.0---->P3.0.15@2920,2064.53 ; 2878.13,2081.87 cw(c2836.26,2040) P0.0---->P3.0.15@2895.47,2040 ; 2878.13,2081.87 ccw(c2920,2123.74) P0.0---->P3.0.15@2920,2064.53 ; 2878.13,2081.87 ccw(c2920,2123.74) P0.0---->P3.0.15@2920,2064.53 ; 2878.13,2081.87 cw(c2836.26,2040) P0.0---->P3.0.15@2895.47,2040 ; 2895.2,2064.8 cw(c2870.4,2040) P0.0---->P3.0.15@2905.47,2040 ; 2895.2,2064.8 ccw(c2920,2089.6) P0.0---->P3.0.15@2920,2054.53 ; 2895.2,2064.8 cw(c2870.4,2040) P0.0---->P3.0.15@2905.47,2040 ; 2895.2,2064.8 ccw(c2920,2089.6) P0.0---->P3.0.15@2920,2054.53 ; 2895.2,2064.8 ccw(c2920,2089.6) P0.0---->P3.0.15@2920,2054.53 ; 2895.2,2064.8 cw(c2870.4,2040) P0.0---->P3.0.15@2905.47,2040
  Top Layer w20: P0.0---->P3.0.15@2920,2040 3045,2040 3095,2090 MAX3232.10@3480,2090 ; 2967.14,2040 cw(c2967.14,2087.14) 2933.81,2053.81 ccw(c2967.14,2087.14) 2967.14,2040 ; 2967.14,2040 ccw(c2967.14,1992.86) 2933.81,2026.19 cw(c2967.14,1992.86) 2967.14,2040
P3_2: K4.3 P0.0---->P3.0.14 TUSB3210.56 | length 2602.1
  Top Layer w10: P0.0---->P3.0.14@2820,2140 2820,2385 2969.09,2534.09 TUSB3210.56@2969.09,2666.57 ; P0.0---->P3.0.14@2802.66,2157.34 ccw(c2760.79,2199.21) 2820,2199.21 ; P0.0---->P3.0.14@2802.66,2157.34 ccw(c2760.79,2199.21) 2820,2199.21 ; P0.0---->P3.0.14@2802.66,2157.34 ccw(c2760.79,2199.21) 2820,2199.21 ; P0.0---->P3.0.14@2809.73,2150.27 ccw(c2784.93,2175.07) 2820,2175.07 ; P0.0---->P3.0.14@2809.73,2150.27 ccw(c2784.93,2175.07) 2820,2175.07 ; P0.0---->P3.0.14@2809.73,2150.27 ccw(c2784.93,2175.07) 2820,2175.07 ; 2820,2175.07 ccw(c2855.07,2175.07) P0.0---->P3.0.14@2830.27,2150.27 ; 2820,2175.07 ccw(c2855.07,2175.07) P0.0---->P3.0.14@2830.27,2150.27 ; 2820,2175.07 ccw(c2855.07,2175.07) P0.0---->P3.0.14@2830.27,2150.27 ; 2820,2199.21 ccw(c2879.21,2199.21) P0.0---->P3.0.14@2837.34,2157.34 ; 2820,2199.21 ccw(c2879.21,2199.21) P0.0---->P3.0.14@2837.34,2157.34 ; 2820,2199.21 ccw(c2879.21,2199.21) P0.0---->P3.0.14@2837.34,2157.34
  Bottom Layer w10: P0.0---->P3.0.14@2820,2140 2865,2095 2865,1990 2880,1975 3021,1975 K4.3@3100,1896 ; P0.0---->P3.0.14@2820,2115.47 cw(c2820,2056.26) 2861.87,2098.13 ; P0.0---->P3.0.14@2820,2115.47 cw(c2820,2056.26) 2861.87,2098.13 ; P0.0---->P3.0.14@2820,2115.47 cw(c2820,2056.26) 2861.87,2098.13 ; P0.0---->P3.0.14@2820,2125.47 cw(c2820,2090.4) 2844.8,2115.2 ; P0.0---->P3.0.14@2820,2125.47 cw(c2820,2090.4) 2844.8,2115.2 ; P0.0---->P3.0.14@2820,2125.47 cw(c2820,2090.4) 2844.8,2115.2 ; P0.0---->P3.0.14@2834.53,2140 ccw(c2869.6,2140) 2844.8,2115.2 ; P0.0---->P3.0.14@2834.53,2140 ccw(c2869.6,2140) 2844.8,2115.2 ; P0.0---->P3.0.14@2834.53,2140 ccw(c2869.6,2140) 2844.8,2115.2 ; P0.0---->P3.0.14@2844.53,2140 ccw(c2903.74,2140) 2861.87,2098.13 ; P0.0---->P3.0.14@2844.53,2140 ccw(c2903.74,2140) 2861.87,2098.13 ; P0.0---->P3.0.14@2844.53,2140 ccw(c2903.74,2140) 2861.87,2098.13 ; 3040.25,1955.75 cw(c2980.5,1896) K4.3@3065,1896 ; 3040.25,1955.75 ccw(c3100,2015.5) K4.3@3100,1931 ; 3040.25,1955.75 cw(c2980.5,1896) K4.3@3065,1896 ; 3040.25,1955.75 ccw(c3100,2015.5) K4.3@3100,1931 ; 3040.25,1955.75 ccw(c3100,2015.5) K4.3@3100,1931 ; 3040.25,1955.75 cw(c2980.5,1896) K4.3@3065,1896 ; 3057.32,1938.68 cw(c3014.64,1896) K4.3@3075,1896 ; 3057.32,1938.68 ccw(c3100,1981.36) K4.3@3100,1921 ; 3057.32,1938.68 cw(c3014.64,1896) K4.3@3075,1896 ; 3057.32,1938.68 ccw(c3100,1981.36) K4.3@3100,1921 ; 3057.32,1938.68 ccw(c3100,1981.36) K4.3@3100,1921 ; 3057.32,1938.68 cw(c3014.64,1896) K4.3@3075,1896
P3_3: K3.3 P0.0---->P3.0.13 TUSB3210.55 | length 2188.9
  Top Layer w10: K3.3@2800,1896 2800,1960 ; TUSB3210.55@2949.41,2666.57 2949.41,2544.41 2765,2360 2765,2095 P0.0---->P3.0.13@2820,2040 2820,1980 2800,1960 ; 2778.13,2081.87 cw(c2736.26,2040) P0.0---->P3.0.13@2795.47,2040 ; 2778.13,2081.87 ccw(c2820,2123.74) P0.0---->P3.0.13@2820,2064.53 ; 2778.13,2081.87 cw(c2736.26,2040) P0.0---->P3.0.13@2795.47,2040 ; 2778.13,2081.87 ccw(c2820,2123.74) P0.0---->P3.0.13@2820,2064.53 ; 2778.13,2081.87 ccw(c2820,2123.74) P0.0---->P3.0.13@2820,2064.53 ; 2778.13,2081.87 cw(c2736.26,2040) P0.0---->P3.0.13@2795.47,2040 ; K3.3@2781.12,1925.47 ccw(c2758.99,1960) 2800,1960 ; K3.3@2781.12,1925.47 ccw(c2758.99,1960) 2800,1960 ; K3.3@2781.12,1925.47 ccw(c2758.99,1960) 2800,1960 ; K3.3@2786.51,1917.05 ccw(c2770.71,1941.71) 2800,1941.71 ; K3.3@2786.51,1917.05 ccw(c2770.71,1941.71) 2800,1941.71 ; K3.3@2786.51,1917.05 ccw(c2770.71,1941.71) 2800,1941.71 ; 2795.2,2064.8 cw(c2770.4,2040) P0.0---->P3.0.13@2805.47,2040 ; 2795.2,2064.8 ccw(c2820,2089.6) P0.0---->P3.0.13@2820,2054.53 ; 2795.2,2064.8 cw(c2770.4,2040) P0.0---->P3.0.13@2805.47,2040 ; 2795.2,2064.8 ccw(c2820,2089.6) P0.0---->P3.0.13@2820,2054.53 ; 2795.2,2064.8 ccw(c2820,2089.6) P0.0---->P3.0.13@2820,2054.53 ; 2795.2,2064.8 cw(c2770.4,2040) P0.0---->P3.0.13@2805.47,2040 ; 2800,1941.71 ccw(c2829.29,1941.71) K3.3@2813.49,1917.05 ; 2800,1941.71 ccw(c2829.29,1941.71) K3.3@2813.49,1917.05 ; 2800,1941.71 ccw(c2829.29,1941.71) K3.3@2813.49,1917.05 ; 2800,1960 ccw(c2841.01,1960) K3.3@2818.88,1925.47 ; 2800,1960 ccw(c2841.01,1960) K3.3@2818.88,1925.47 ; 2800,1960 ccw(c2841.01,1960) K3.3@2818.88,1925.47 ; P0.0---->P3.0.13@2802.66,2022.66 cw(c2760.79,1980.79) 2820,1980.79 ; P0.0---->P3.0.13@2802.66,2022.66 cw(c2760.79,1980.79) 2820,1980.79 ; P0.0---->P3.0.13@2802.66,2022.66 cw(c2760.79,1980.79) 2820,1980.79 ; P0.0---->P3.0.13@2809.73,2029.73 cw(c2784.93,2004.93) 2820,2004.93 ; P0.0---->P3.0.13@2809.73,2029.73 cw(c2784.93,2004.93) 2820,2004.93 ; P0.0---->P3.0.13@2809.73,2029.73 cw(c2784.93,2004.93) 2820,2004.93 ; 2820,1980.79 cw(c2879.21,1980.79) P0.0---->P3.0.13@2837.34,2022.66 ; 2820,1980.79 cw(c2879.21,1980.79) P0.0---->P3.0.13@2837.34,2022.66 ; 2820,1980.79 cw(c2879.21,1980.79) P0.0---->P3.0.13@2837.34,2022.66 ; 2820,2004.93 cw(c2855.07,2004.93) P0.0---->P3.0.13@2830.27,2029.73 ; 2820,2004.93 cw(c2855.07,2004.93) P0.0---->P3.0.13@2830.27,2029.73 ; 2820,2004.93 cw(c2855.07,2004.93) P0.0---->P3.0.13@2830.27,2029.73
P3_4: K2.3 P0.0---->P3.0.12 TUSB3210.54 | length 2535.5
  Top Layer w10: P0.0---->P3.0.12@2720,2140 2720,2340 2929.72,2549.72 TUSB3210.54@2929.72,2666.57 ; P0.0---->P3.0.12@2702.66,2157.34 ccw(c2660.79,2199.21) 2720,2199.21 ; P0.0---->P3.0.12@2702.66,2157.34 ccw(c2660.79,2199.21) 2720,2199.21 ; P0.0---->P3.0.12@2702.66,2157.34 ccw(c2660.79,2199.21) 2720,2199.21 ; P0.0---->P3.0.12@2709.73,2150.27 ccw(c2684.93,2175.07) 2720,2175.07 ; P0.0---->P3.0.12@2709.73,2150.27 ccw(c2684.93,2175.07) 2720,2175.07 ; P0.0---->P3.0.12@2709.73,2150.27 ccw(c2684.93,2175.07) 2720,2175.07 ; 2720,2175.07 ccw(c2755.07,2175.07) P0.0---->P3.0.12@2730.27,2150.27 ; 2720,2175.07 ccw(c2755.07,2175.07) P0.0---->P3.0.12@2730.27,2150.27 ; 2720,2175.07 ccw(c2755.07,2175.07) P0.0---->P3.0.12@2730.27,2150.27 ; 2720,2199.21 ccw(c2779.21,2199.21) P0.0---->P3.0.12@2737.34,2157.34 ; 2720,2199.21 ccw(c2779.21,2199.21) P0.0---->P3.0.12@2737.34,2157.34 ; 2720,2199.21 ccw(c2779.21,2199.21) P0.0---->P3.0.12@2737.34,2157.34
  Bottom Layer w10: K2.3@2520,1896 2594,1970 2635,1970 2670,2005 2670,2090 P0.0---->P3.0.12@2720,2140 ; K2.3@2520,1921 ccw(c2520,1981.36) 2562.68,1938.68 ; K2.3@2520,1921 ccw(c2520,1981.36) 2562.68,1938.68 ; K2.3@2520,1921 ccw(c2520,1981.36) 2562.68,1938.68 ; K2.3@2520,1931 ccw(c2520,2015.5) 2579.75,1955.75 ; K2.3@2520,1931 ccw(c2520,2015.5) 2579.75,1955.75 ; K2.3@2520,1931 ccw(c2520,2015.5) 2579.75,1955.75 ; K2.3@2545,1896 cw(c2605.36,1896) 2562.68,1938.68 ; K2.3@2545,1896 cw(c2605.36,1896) 2562.68,1938.68 ; K2.3@2545,1896 cw(c2605.36,1896) 2562.68,1938.68 ; K2.3@2555,1896 cw(c2639.5,1896) 2579.75,1955.75 ; K2.3@2555,1896 cw(c2639.5,1896) 2579.75,1955.75 ; K2.3@2555,1896 cw(c2639.5,1896) 2579.75,1955.75 ; 2678.13,2098.13 cw(c2720,2056.26) P0.0---->P3.0.12@2720,2115.47 ; 2678.13,2098.13 ccw(c2636.26,2140) P0.0---->P3.0.12@2695.47,2140 ; 2678.13,2098.13 cw(c2720,2056.26) P0.0---->P3.0.12@2720,2115.47 ; 2678.13,2098.13 ccw(c2636.26,2140) P0.0---->P3.0.12@2695.47,2140 ; 2678.13,2098.13 ccw(c2636.26,2140) P0.0---->P3.0.12@2695.47,2140 ; 2678.13,2098.13 cw(c2720,2056.26) P0.0---->P3.0.12@2720,2115.47 ; 2695.2,2115.2 cw(c2720,2090.4) P0.0---->P3.0.12@2720,2125.47 ; 2695.2,2115.2 ccw(c2670.4,2140) P0.0---->P3.0.12@2705.47,2140 ; 2695.2,2115.2 cw(c2720,2090.4) P0.0---->P3.0.12@2720,2125.47 ; 2695.2,2115.2 ccw(c2670.4,2140) P0.0---->P3.0.12@2705.47,2140 ; 2695.2,2115.2 ccw(c2670.4,2140) P0.0---->P3.0.12@2705.47,2140 ; 2695.2,2115.2 cw(c2720,2090.4) P0.0---->P3.0.12@2720,2125.47
P3_5: K1.3 P0.0---->P3.0.11 TUSB3210.53 | length 2853.5
  Top Layer w10: K1.3@2240,1896 2309,1965 2645,1965 P0.0---->P3.0.11@2720,2040 2675,2085 2675,2330 2910.04,2565.04 TUSB3210.53@2910.04,2666.57 ; K1.3@2240,1921 ccw(c2240,1981.36) 2282.68,1938.68 ; K1.3@2240,1921 ccw(c2240,1981.36) 2282.68,1938.68 ; K1.3@2240,1921 ccw(c2240,1981.36) 2282.68,1938.68 ; K1.3@2240,1931 ccw(c2240,2015.5) 2299.75,1955.75 ; K1.3@2240,1931 ccw(c2240,2015.5) 2299.75,1955.75 ; K1.3@2240,1931 ccw(c2240,2015.5) 2299.75,1955.75 ; K1.3@2265,1896 cw(c2325.36,1896) 2282.68,1938.68 ; K1.3@2265,1896 cw(c2325.36,1896) 2282.68,1938.68 ; K1.3@2265,1896 cw(c2325.36,1896) 2282.68,1938.68 ; K1.3@2275,1896 cw(c2359.5,1896) 2299.75,1955.75 ; K1.3@2275,1896 cw(c2359.5,1896) 2299.75,1955.75 ; K1.3@2275,1896 cw(c2359.5,1896) 2299.75,1955.75 ; 2678.13,1998.13 cw(c2720,1956.26) P0.0---->P3.0.11@2720,2015.47 ; 2678.13,1998.13 ccw(c2636.26,2040) P0.0---->P3.0.11@2695.47,2040 ; 2678.13,1998.13 cw(c2720,1956.26) P0.0---->P3.0.11@2720,2015.47 ; 2678.13,1998.13 ccw(c2636.26,2040) P0.0---->P3.0.11@2695.47,2040 ; 2678.13,1998.13 ccw(c2636.26,2040) P0.0---->P3.0.11@2695.47,2040 ; 2678.13,1998.13 cw(c2720,1956.26) P0.0---->P3.0.11@2720,2015.47 ; 2678.13,2081.87 cw(c2636.26,2040) P0.0---->P3.0.11@2695.47,2040 ; 2678.13,2081.87 ccw(c2720,2123.74) P0.0---->P3.0.11@2720,2064.53 ; 2678.13,2081.87 cw(c2636.26,2040) P0.0---->P3.0.11@2695.47,2040 ; 2678.13,2081.87 ccw(c2720,2123.74) P0.0---->P3.0.11@2720,2064.53 ; 2678.13,2081.87 ccw(c2720,2123.74) P0.0---->P3.0.11@2720,2064.53 ; 2678.13,2081.87 cw(c2636.26,2040) P0.0---->P3.0.11@2695.47,2040 ; 2695.2,2015.2 cw(c2720,1990.4) P0.0---->P3.0.11@2720,2025.47 ; 2695.2,2015.2 ccw(c2670.4,2040) P0.0---->P3.0.11@2705.47,2040 ; 2695.2,2015.2 cw(c2720,1990.4) P0.0---->P3.0.11@2720,2025.47 ; 2695.2,2015.2 ccw(c2670.4,2040) P0.0---->P3.0.11@2705.47,2040 ; 2695.2,2015.2 ccw(c2670.4,2040) P0.0---->P3.0.11@2705.47,2040 ; 2695.2,2015.2 cw(c2720,1990.4) P0.0---->P3.0.11@2720,2025.47 ; 2695.2,2064.8 cw(c2670.4,2040) P0.0---->P3.0.11@2705.47,2040 ; 2695.2,2064.8 ccw(c2720,2089.6) P0.0---->P3.0.11@2720,2054.53 ; 2695.2,2064.8 cw(c2670.4,2040) P0.0---->P3.0.11@2705.47,2040 ; 2695.2,2064.8 ccw(c2720,2089.6) P0.0---->P3.0.11@2720,2054.53 ; 2695.2,2064.8 ccw(c2720,2089.6) P0.0---->P3.0.11@2720,2054.53 ; 2695.2,2064.8 cw(c2670.4,2040) P0.0---->P3.0.11@2705.47,2040
P3_6: P0.0---->P3.0.10 TUSB3210.52 | length 1082.9
  Top Layer w10: P0.0---->P3.0.10@2620,2140 2620,2300 2890.35,2570.35 TUSB3210.52@2890.35,2666.57 ; P0.0---->P3.0.10@2602.66,2157.34 ccw(c2560.79,2199.21) 2620,2199.21 ; P0.0---->P3.0.10@2602.66,2157.34 ccw(c2560.79,2199.21) 2620,2199.21 ; P0.0---->P3.0.10@2602.66,2157.34 ccw(c2560.79,2199.21) 2620,2199.21 ; P0.0---->P3.0.10@2609.73,2150.27 ccw(c2584.93,2175.07) 2620,2175.07 ; P0.0---->P3.0.10@2609.73,2150.27 ccw(c2584.93,2175.07) 2620,2175.07 ; P0.0---->P3.0.10@2609.73,2150.27 ccw(c2584.93,2175.07) 2620,2175.07 ; 2620,2175.07 ccw(c2655.07,2175.07) P0.0---->P3.0.10@2630.27,2150.27 ; 2620,2175.07 ccw(c2655.07,2175.07) P0.0---->P3.0.10@2630.27,2150.27 ; 2620,2175.07 ccw(c2655.07,2175.07) P0.0---->P3.0.10@2630.27,2150.27 ; 2620,2199.21 ccw(c2679.21,2199.21) P0.0---->P3.0.10@2637.34,2157.34 ; 2620,2199.21 ccw(c2679.21,2199.21) P0.0---->P3.0.10@2637.34,2157.34 ; 2620,2199.21 ccw(c2679.21,2199.21) P0.0---->P3.0.10@2637.34,2157.34
P3_7: P0.0---->P3.0.9 TUSB3210.51 | length 1216.1
  Top Layer w10: P0.0---->P3.0.9@2620,2040 2570,2090 2570,2275 2870.67,2575.67 TUSB3210.51@2870.67,2666.57 ; 2578.13,2081.87 cw(c2536.26,2040) P0.0---->P3.0.9@2595.47,2040 ; 2578.13,2081.87 ccw(c2620,2123.74) P0.0---->P3.0.9@2620,2064.53 ; 2578.13,2081.87 cw(c2536.26,2040) P0.0---->P3.0.9@2595.47,2040 ; 2578.13,2081.87 ccw(c2620,2123.74) P0.0---->P3.0.9@2620,2064.53 ; 2578.13,2081.87 ccw(c2620,2123.74) P0.0---->P3.0.9@2620,2064.53 ; 2578.13,2081.87 cw(c2536.26,2040) P0.0---->P3.0.9@2595.47,2040 ; 2595.2,2064.8 cw(c2570.4,2040) P0.0---->P3.0.9@2605.47,2040 ; 2595.2,2064.8 ccw(c2620,2089.6) P0.0---->P3.0.9@2620,2054.53 ; 2595.2,2064.8 cw(c2570.4,2040) P0.0---->P3.0.9@2605.47,2040 ; 2595.2,2064.8 ccw(c2620,2089.6) P0.0---->P3.0.9@2620,2054.53 ; 2595.2,2064.8 ccw(c2620,2089.6) P0.0---->P3.0.9@2620,2054.53 ; 2595.2,2064.8 cw(c2570.4,2040) P0.0---->P3.0.9@2605.47,2040
RST_TUSB: C11.1 R10.1 R11.2 TUSB3210.13 | length 2087
  Top Layer w10: TUSB3210.13@3225,3001.22 3291.22,3001.22 3315,3025 3480,3025 v1(3695,2810) ; v1@3685,2810 ccw(c3660.86,2810) 3677.93,2827.07 ccw(c3695,2844.14) v1@3695,2820
  Bottom Layer w10: v1(3695,2810) 4390,2810 4520,2940 R11.2@4520,3021.61 ; v1@3702.07,2802.93 cw(c3719.14,2785.86) 3719.14,2810 cw(c3719.14,2834.14) v1@3702.07,2817.07 ; R11.2@4505.44,3006.07 cw(c4470.29,2970.92) 4520,2970.92 cw(c4569.71,2970.92) R11.2@4534.56,3006.07
  Bottom Layer w30: R10.1@4285,2963.39 4285,3025 ; C11.1@4285,3086.61 4285,3025 ; 4476.56,3030 cw(c4476.56,2979.16) R11.2@4512.51,3015.11 ; R11.2@4520,3021.61 4511.61,3030 4290,3030 4285,3025
SCL: AT24CXX.6 R18.1 TUSB3210.12 | length 1165.2
  Top Layer w10: TUSB3210.12@3225,2981.53 3321.53,2981.53 v1(3325,2985) ; 3292.49,2981.53 ccw(c3292.49,3017.51) v1@3317.93,2992.07 ; 3309.22,2981.54 cw(c3309.22,2969.22) v1@3317.93,2977.93
  Bottom Layer w10: v1@3317.93,2977.93 cw(c3300.86,2960.86) 3325,2960.86 cw(c3349.14,2960.86) v1@3332.07,2977.93 ; v1(3325,2985) 3325,2695 AT24CXX.6@3495,2525 ; AT24CXX.6@3470.47,2525 ccw(c3411.26,2525) 3453.13,2566.87 ccw(c3495,2608.74) AT24CXX.6@3495,2549.53 ; AT24CXX.6@3480.47,2525 ccw(c3445.4,2525) 3470.2,2549.8 ccw(c3495,2574.6) AT24CXX.6@3495,2539.53
  Bottom Layer w30: AT24CXX.6@3495,2525 3596.61,2525 R18.1@3621.61,2500 ; AT24CXX.6@3505.27,2514.73 cw(c3530.07,2489.93) 3530.07,2525 cw(c3530.07,2560.07) AT24CXX.6@3505.27,2535.27 ; 3534.71,2525 cw(c3534.71,2414.08) R18.1@3613.14,2492.51 ; R18.1@3607.13,2525 cw(c3607.13,2486.5) R18.1@3634.35,2513.72
SDA: AT24CXX.5 R19.1 TUSB3210.11 | length 976.7
  Top Layer w10: TUSB3210.11@3225,2961.85 3293.15,2961.85 3305,2950 v1(3385,2950) ; v1@3377.93,2942.93 ccw(c3360.86,2925.86) 3360.86,2950 ccw(c3360.86,2974.14) v1@3377.93,2957.07
  Bottom Layer w10: v1@3377.93,2942.93 cw(c3360.86,2925.86) 3385,2925.86 cw(c3409.14,2925.86) v1@3392.07,2942.93 ; v1(3385,2950) 3385,2735 AT24CXX.5@3495,2625 ; AT24CXX.5@3470.47,2625 ccw(c3411.26,2625) 3453.13,2666.87 ccw(c3495,2708.74) AT24CXX.5@3495,2649.53 ; AT24CXX.5@3480.47,2625 ccw(c3445.4,2625) 3470.2,2649.8 ccw(c3495,2674.6) AT24CXX.5@3495,2639.53
  Bottom Layer w30: AT24CXX.5@3495,2625 3616.61,2625 R19.1@3621.61,2620 ; AT24CXX.5@3505.27,2614.73 cw(c3530.07,2589.93) 3530.07,2625 cw(c3530.07,2660.07) AT24CXX.5@3505.27,2635.27 ; 3582.99,2625 cw(c3582.99,2582.36) R19.1@3613.14,2612.51
SUSP: R14.1 SUSP.2 TUSB3210.16 TUSB3210.38 | length 1936.3
  Top Layer w10: v1(2655,2965) 2658.15,2961.85 TUSB3210.38@2732.87,2961.85 3058.06,2961.85 3156.49,3060.28 TUSB3210.16@3225,3060.28 3545.28,3060.28 v1(3575,3090) ; v1@2662.07,2957.93 cw(c2671.54,2948.46) 2671.54,2961.85 ; v1@2662.07,2972.07 ccw(c2686.75,2996.75) TUSB3210.38@2686.75,2961.85 ; v1@3565,3090 cw(c3540.86,3090) 3557.93,3072.93 cw(c3575,3055.86) v1@3575,3080
  Bottom Layer w10: v1(3575,3090) 3820,3335 4130,3335 ; v1@3575,3100 ccw(c3575,3124.14) 3592.07,3107.07 ccw(c3609.14,3090) v1@3585,3090 ; SUSP.2@4144.08,3373.02 cw(c4095.68,3369.32) 4130,3335 ; SUSP.2@4154.05,3373.78 cw(c4124.27,3371.5) 4145.39,3350.39 cw(c4166.5,3329.27) SUSP.2@4168.78,3359.05 ; SUSP.2@4168.02,3349.08 ccw(c4164.32,3300.68) 4130,3335 ; SUSP.2@4170,3375 4130,3335
VBUS: AS1117-3.3.3 C1.2 C2.2 J1.1 R13.2 | length 2062
  Top Layer w30: J1.1@2955,3630 3015,3690 3244.84,3690 3344.84,3590 3520,3590 3651.61,3458.39 3759.45,3350.55 AS1117-3.3.3@3759.45,3047.05 ; J1.1@2955,3647.5 ccw(c2955,3689.75) 2984.87,3659.87 ccw(c3014.75,3630) J1.1@2972.5,3630 ; 3735.92,3374.08 cw(c3701.85,3340) C1.2@3750.04,3340 ; 3759.45,3311.58 cw(c3789.05,3311.58) C1.2@3768.12,3332.51
  Bottom Layer w30: C2.2@2680,3590.04 cw(c2680,3562.09) C2.2@2699.76,3581.85 ; C2.2@2680,3601.61 2793.23,3488.39 R13.2@2915,3488.39 2915,3590 J1.1@2955,3630 ; 2925.13,3600.13 cw(c2955,3570.25) J1.1@2955,3612.5 ; 2925.13,3600.13 ccw(c2895.25,3630) J1.1@2937.5,3630 ; 2925.13,3600.13 cw(c2955,3570.25) J1.1@2955,3612.5 ; 2925.13,3600.13 ccw(c2895.25,3630) J1.1@2937.5,3630 ; 2925.13,3600.13 ccw(c2895.25,3630) J1.1@2937.5,3630 ; 2925.13,3600.13 cw(c2955,3570.25) J1.1@2955,3612.5
pads on no net: AT24CXX.7 JP_COM1.1 JP_COM1.4 JP_COM1.6 JP_COM1.7 JP_COM1.8 JP_COM1.9 K1.1 K1.4 K2.1 K2.4 K3.1 K3.4 K4.1 K4.4 MAX3232.11 MAX3232.12 MAX3232.13 MAX3232.14 SW1.1 SW1.4 TUSB3210.1 TUSB3210.2 TUSB3210.3 TUSB3210.4 TUSB3210.6 TUSB3210.7 TUSB3210.14 TUSB3210.15 TUSB3210.20 TUSB3210.63 TUSB3210.64

## Polygon pours and split planes (outlines as drawn)
GND on Top Layer "1" (hatched 90Degree grid 20 track 8, remove dead copper, pour order 1000): 1705,3840 1705,1575 4740,1575 4740,3840 1705,3840
GND on Bottom Layer "2" (hatched 90Degree grid 20 track 8, remove dead copper, pour order 1001): 1705,3840 1705,1575 4740,1575 4740,3840

## Silkscreen, mask and mechanical layers (free items; w line width, h text height)
Top Overlay:
  text "Design" at 3845,2655 h60
  text "By KKK" at 3850,2520 h60
  text "20100417" at 3845,2420 h50
  text "http://bbs.dspoz.com/" at 2215,2360 h70 r90
Mechanical 1:
  lines w10: 1705,1575 4740,1575 4740,3840 1705,3840 1705,1575

## Text inside footprints (layer, text, board x,y; h text height)
JP_COM1: Top Overlay "1" at 4174.06,2407.95 h59.06 r270; Top Overlay "5" at 4174.06,1981.57 h59.06 r270; Top Overlay "9" at 4544.13,2036.1 h59.06 r270; Top Overlay "6" at 4544.13,2363.27 h59.06 r270
P0.0---->P3.0: Top Overlay "16" at 2980,2120 h50; Top Overlay "15" at 2980,2020 h50; Top Overlay "1" at 2120,2020 h50; Top Overlay "2" at 2120,2120 h50
P2.0--->P1.7: Top Overlay "16" at 2440,2840 h50 r270; Top Overlay "15" at 2340,2840 h50 r270; Top Overlay "1" at 2340,3700 h50 r270; Top Overlay "2" at 2440,3700 h50 r270
Q1: Top Overlay "1" at 3395.28,3494.8 h59.05 r180; Top Overlay "3" at 3404.33,3399.92 h59.05 r180
?: Top Overlay "YSUWUXIE" at 4065,3760 h60